# Altium PCB USB.PcbDoc
Units mil, origin at the board's own origin, x right, y up, seen from the top; angles counter-clockwise.
Board outline 2345 x 1600 mil, 2 copper layers (Top Layer, Bottom Layer), stack 65.792 mil thick; 40 components, 27 nets, 133 pads, 28 vias.
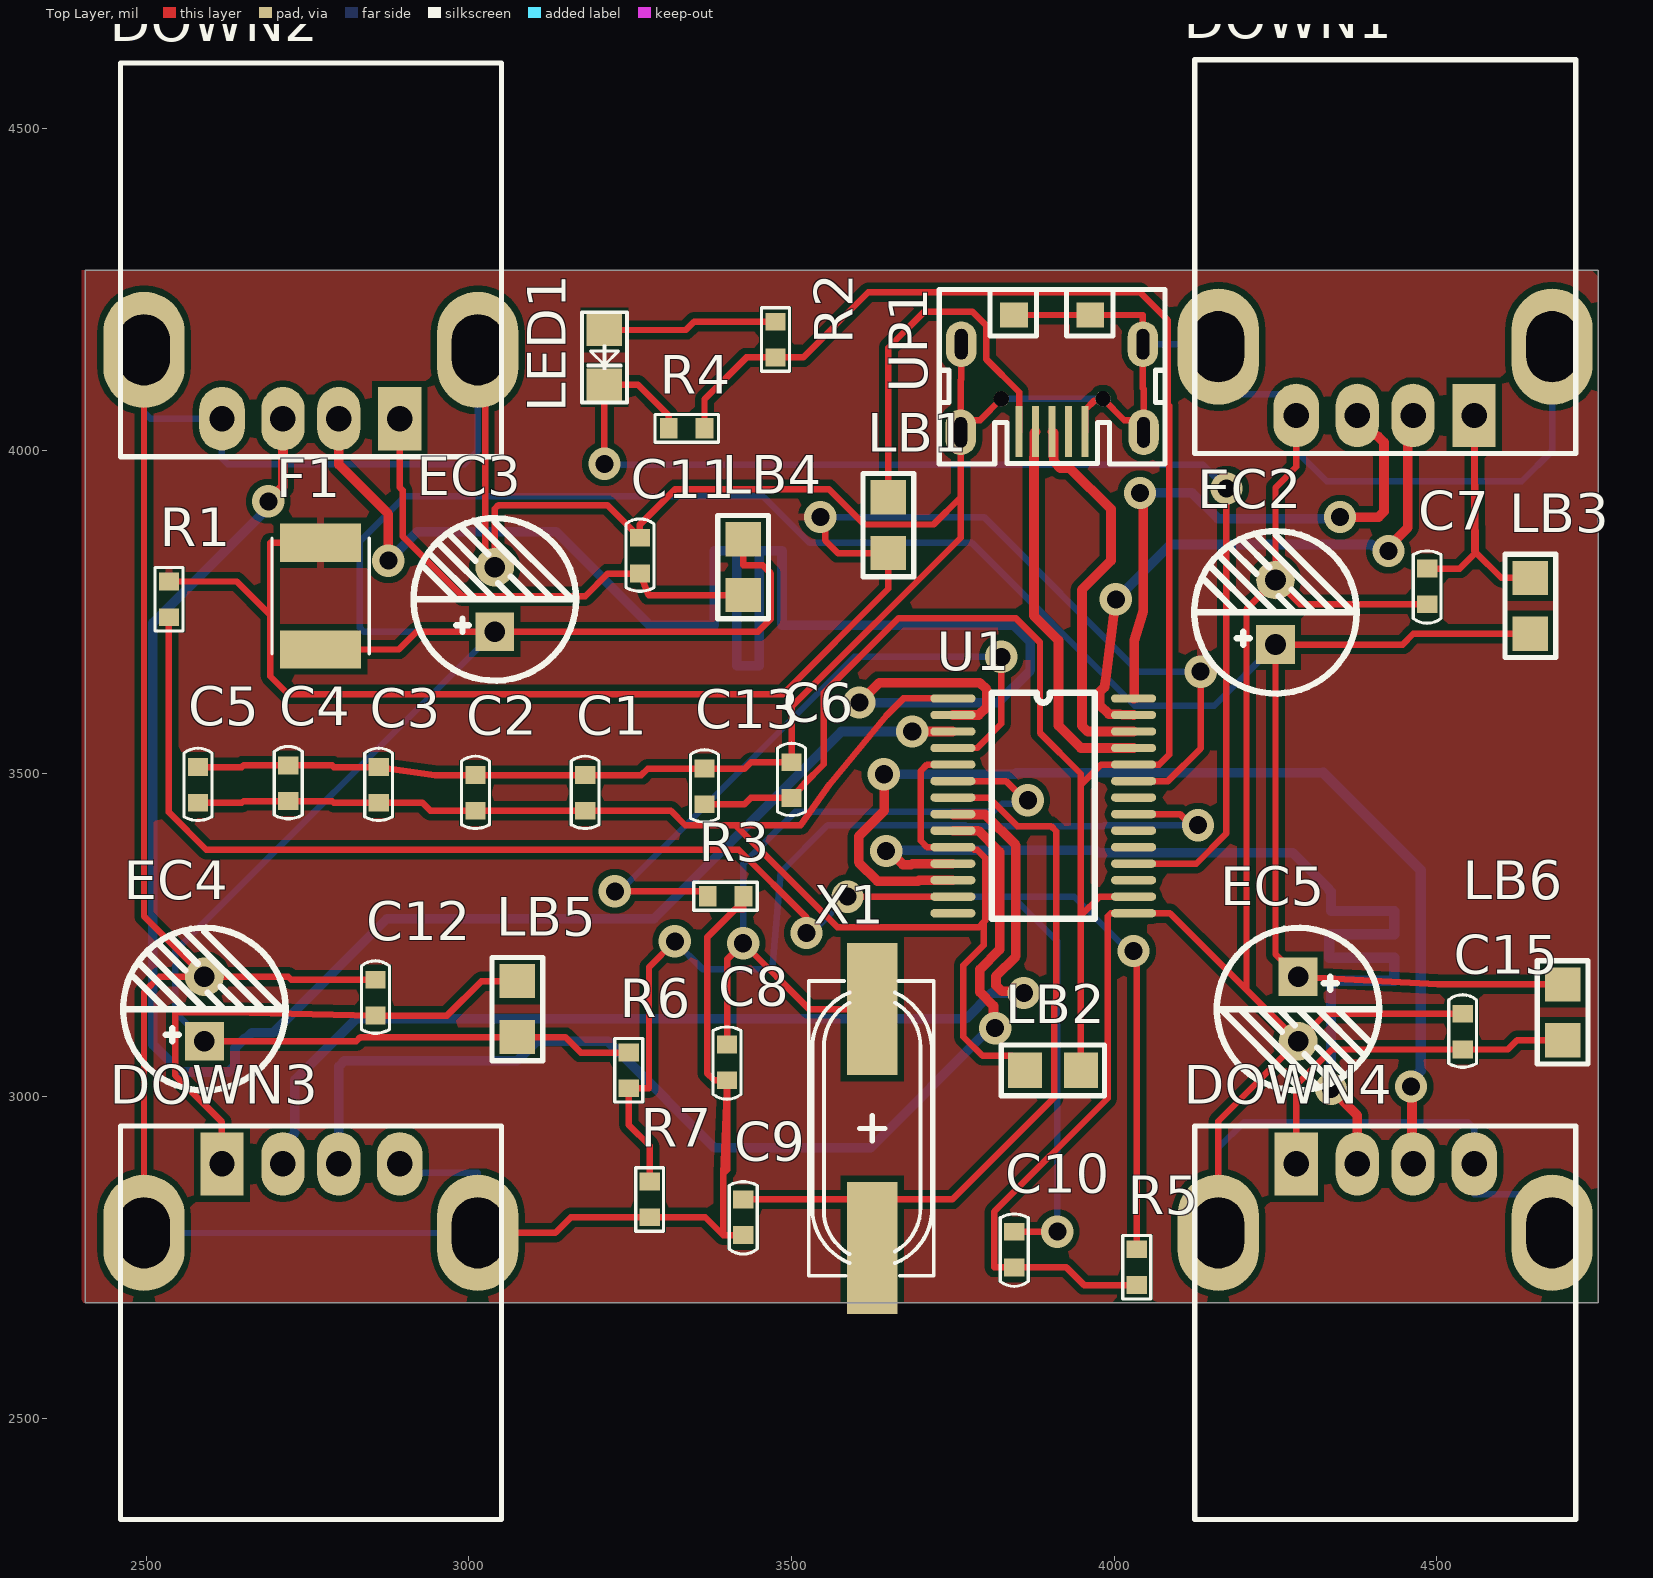
[diagram p0: Top Layer view]
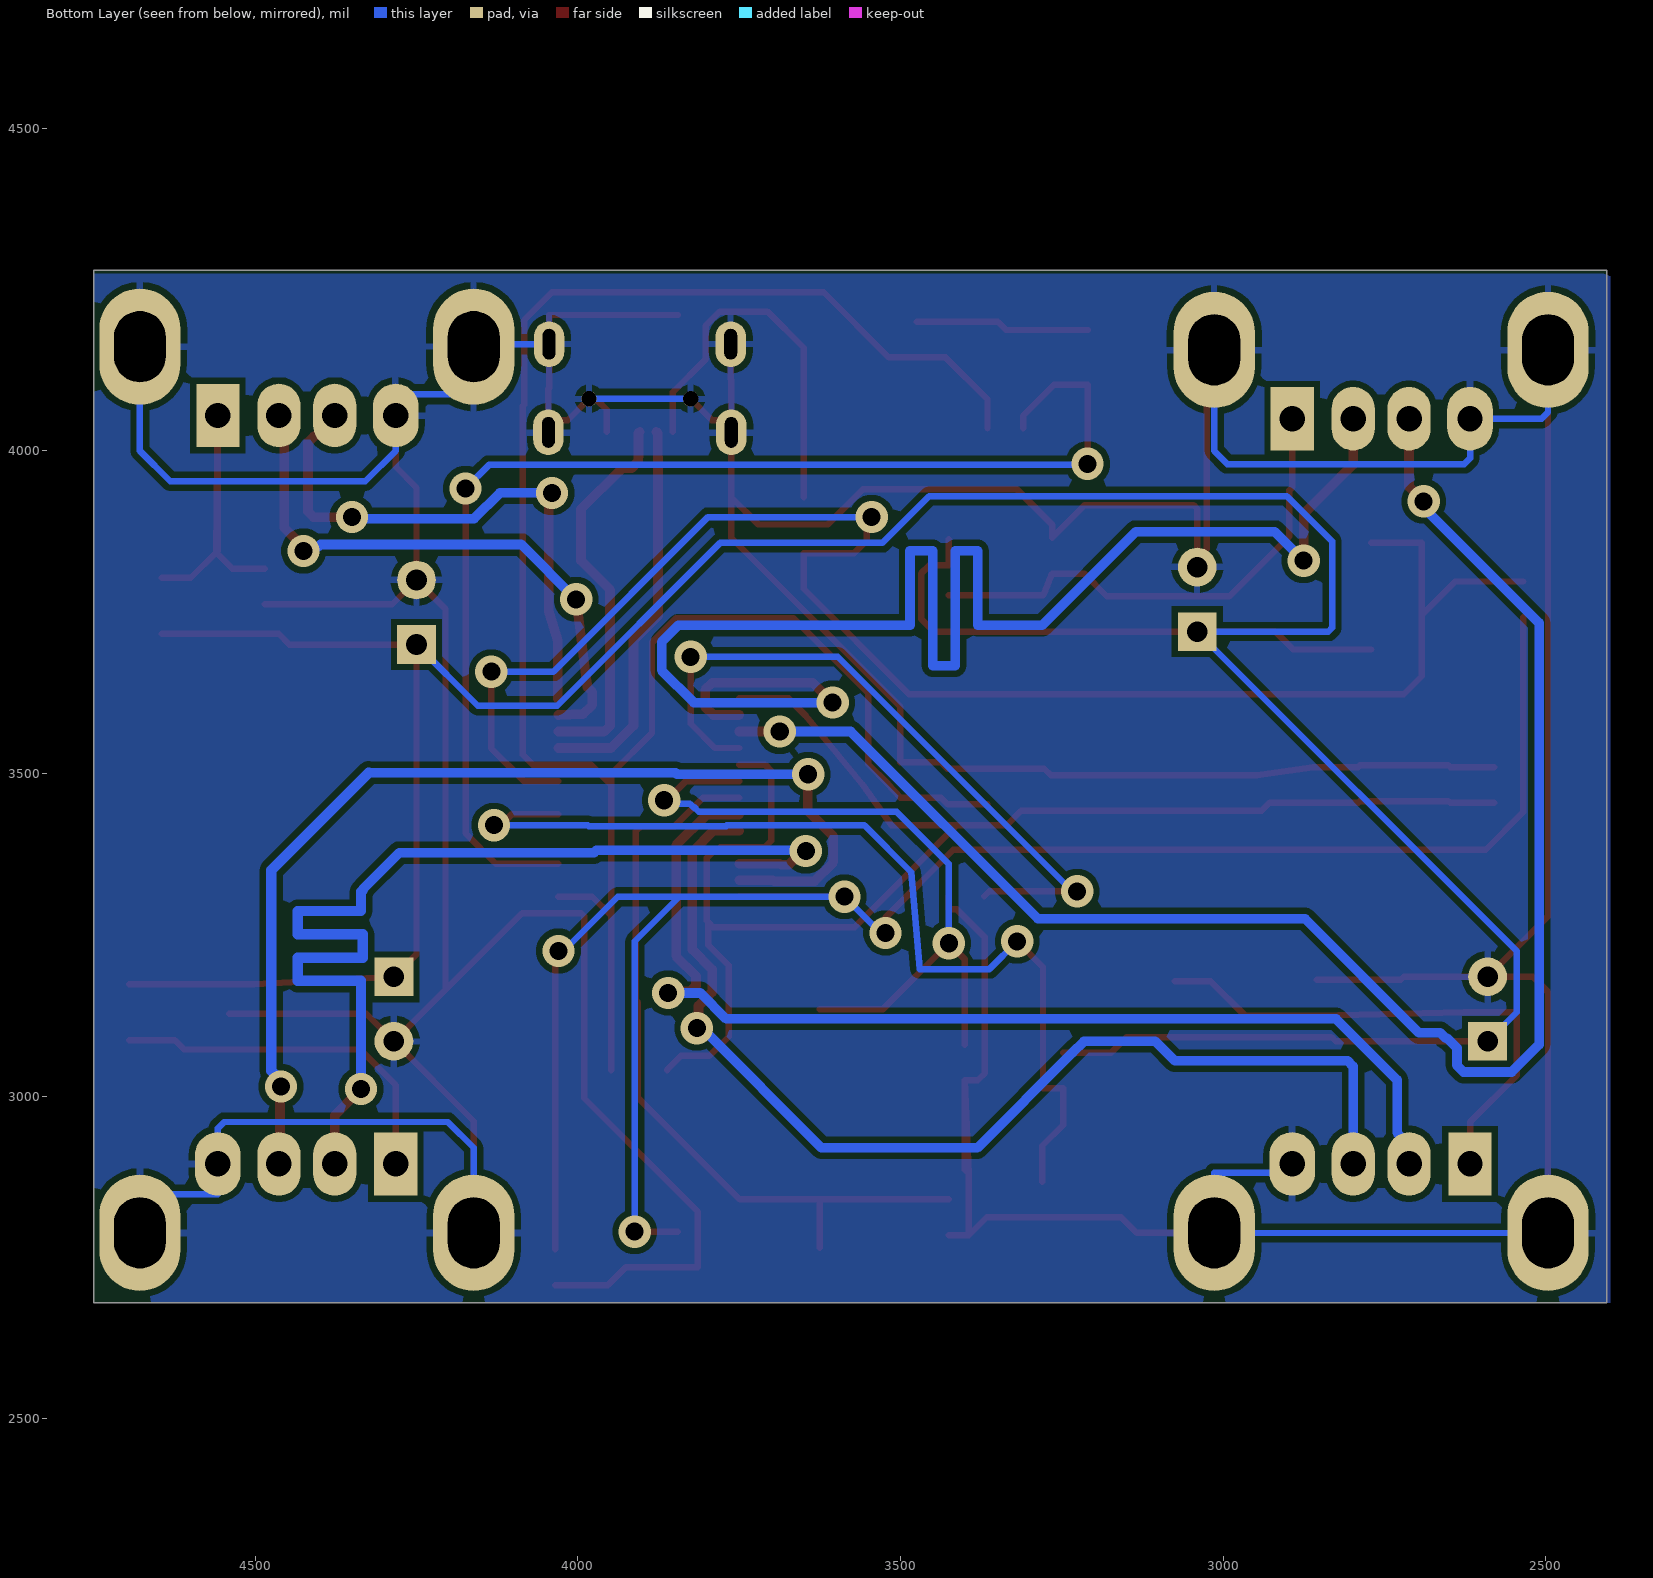
[diagram p1: Bottom Layer view, seen from below]

## Layer stack, top to bottom
Top Solder: solder mask 0.4, Solder Resist, Dk 3.5
Top Layer: signal copper 1.4
Dielectric 1: dielectric 62.9921, FR-4, Dk 4.8
Bottom Layer: signal copper 1.4
Bottom Solder: solder mask 0.4, Solder Resist, Dk 3.5

## Board outline
2405,4280 4750,4280 4750,2680 2405,2680

## Design rules (kind name [scope] priority, off if disabled: settings)
AssemblyTestPointUsage [All] p1: isadvanced=TRUE
AssemblyTestpoint [All] p1: isadvanced=TRUE testpointundercomponent=TRUE minsize=40 maxsize=100 preferedsize=60 minholesize=0 maxholesize=40 preferedholesize=32 testpointgrid=1 usegrid=TRUE gridtolerance=0.01 allowsidetop=TRUE allowsidebottom=TRUE
Clearance Clearance_1 [OnMid vs OnMid] p1: gap=10 ignorepadtopadclearanceinfootprint=FALSE sourcerule=40 cellrowname=All cellrowtype=0 cellcolname=All cellcoltype=0 innerlayers=TRUE
Clearance Clearance_2 [(ExistsOnLayer('Top Layer') Or ExistsOnLayer('Bottom Layer')) vs (ExistsOnLayer('Top Layer') Or ExistsOnLayer('Bottom Layer'))] p2: gap=10 ignorepadtopadclearanceinfootprint=FALSE sourcerule=40 cellrowname=All cellrowtype=0 cellcolname=All cellcoltype=0 outerlayers=TRUE
Clearance [All] p3: gap=10 ignorepadtopadclearanceinfootprint=FALSE ismatrix=TRUE
ComponentClearance [All] p1: isadvanced=TRUE gap=10 collisioncheckmode=3 verticalgap=10 showdistances=FALSE
DiffPairsRouting [All] p1: maxlimit=10 minlimit=10 mostfreqgap=10 toplayer_minwidth=15 toplayer_maxwidth=15 toplayer_prefwidth=15 bottomlayer_minwidth=15 bottomlayer_maxwidth=15 bottomlayer_prefwidth=15 maxuncoupledlength=500
FabricationTestPointUsage [All] p1: isadvanced=TRUE valid=0 allowmultiple=FALSE
FabricationTestpoint [All] p1: isadvanced=TRUE side=3 testpointundercomponent=TRUE minsize=40 maxsize=100 preferedsize=60 minholesize=0 maxholesize=40 preferedholesize=32 testpointgrid=1 allowsidetop=TRUE allowsidebottom=TRUE usegrid=TRUE gridtolerance=0.01
FanoutControl Fanout_BGA [IsBGA] p1: isadvanced=TRUE bgadir=Out bgaviamode=Centered fanoutstyle=Auto fanoutdirection=Alternating viagrid=1 // Fanout_BGA (Default Rule)
FanoutControl Fanout_LCC [IsLCC] p2: isadvanced=TRUE bgadir=Out bgaviamode=Centered fanoutstyle=Auto fanoutdirection=Alternating viagrid=1 // Fanout_LCC (Default Rule)
FanoutControl Fanout_SOIC [IsSOIC] p3: isadvanced=TRUE bgadir=Out bgaviamode=Centered fanoutstyle=Auto fanoutdirection=Alternating viagrid=1 // Fanout_SOIC (Default Rule)
FanoutControl Fanout_Small [(CompPinCount < 5)] p4: isadvanced=TRUE bgadir=Out bgaviamode=Centered fanoutstyle=Auto fanoutdirection=OutThenIn viagrid=1 // Fanout_Small (Default Rule)
FanoutControl Fanout_Default [All] p5: isadvanced=TRUE bgadir=Out bgaviamode=Centered fanoutstyle=Auto fanoutdirection=Alternating viagrid=1 // Fanout_Default (Default Rule)
Height [All] p1: isadvanced=TRUE minheight=0 maxheight=1000 prefheight=500
HoleSize [All] p1: isadvanced=TRUE absolutevalues=TRUE maxlimit=150 minlimit=1 maxpercent=80.000 minpercent=20.000
HoleToHoleClearance [All] p1: isadvanced=TRUE gap=10 allowstackedmicrovias=TRUE
LayerPairs [All] p1: isadvanced=TRUE enforce=TRUE
MinimumSolderMaskSliver [All] p1: isadvanced=TRUE minsoldermaskwidth=0
NetAntennae [All] p1: isadvanced=TRUE netantennaetolerance=0
PasteMaskExpansion [All] p1: isadvanced=TRUE expansion=0
PlaneClearance [All] p1: isadvanced=TRUE clearance=20
PlaneConnect [All] p1: isadvanced=TRUE planeconnectstyle=Relief reliefexpansion=20 reliefentries=4 reliefconductorwidth=10 reliefairgap=10
PolygonConnect [All] p1: connectstyle=Relief reliefconductorwidth=10 reliefentries=4 polygonreliefangle="90 Angle" airgapwidth=10
RoutingCorners [All] p1: isadvanced=TRUE cornerstyle=45-Degree minsetback=100 maxsetback=100
RoutingPriority [All] p1: isadvanced=TRUE routingpriority=0
RoutingVias [All] p1: holewidth=28 width=50 viastyle="Through Hole" minholewidth=28 minwidth=50 maxholewidth=28 maxwidth=50
ShortCircuit [All] p1: isadvanced=TRUE allowed=FALSE
SilkToSilkClearance [All] p1: isadvanced=TRUE silktosilkclearance=0
SilkToSolderMaskClearance [IsPad] p1: isadvanced=TRUE minsilkscreentomaskgap=0 clearancetoexposedcopper=TRUE
SolderMaskExpansion [All] p1: isadvanced=TRUE expansion=0 istentingtop=FALSE
SupplyNets "Schematic Supply Nets_3" [InNet('AVDD')] p1: isadvanced=TRUE voltage=0.000
SupplyNets "Schematic Supply Nets_2" [InNet('DGND')] p2: isadvanced=TRUE voltage=0.000
SupplyNets "Schematic Supply Nets_1" [InNet('DVDD')] p3: isadvanced=TRUE voltage=0.000
SupplyNets "Schematic Supply Nets" [InNet('VCC')] p4: isadvanced=TRUE voltage=0.000
UnRoutedNet [All] p1: isadvanced=TRUE
UnpouredPolygon [All] p1: isadvanced=TRUE
Width [All] p1: maxlimit=10 minlimit=10 preferedwidth=10
3 further rules are at their usual default settings.

## Classes and differential pairs
differential pair D_USB4: +USB4_P -USB4_N
differential pair D_USB3: +USB3_P -USB3_N
differential pair D_USB2: +USB2_P -USB2_N
differential pair D_USB1: +USB1_P -USB1_N
differential pair D_USB0: +USB0_P -USB0_N

## Components (designator, comment, footprint, x,y, rotation, side; value= is the part's Value field where it differs from the comment)
C1 "1uF" C0603 3180,3470 r270 top
C2 "0.1uF" C0603 3010,3470 r270 top
C3 "0.1uF" C0603 2860,3482.33 r270 top
C4 "0.1uF" C0603 2720,3485 r270 top
C5 "0.1uF" C0603 2580,3482.33 r270 top
C6 "0.1uF" C0603 3500,3490 r270 top
C7 "0.1uF" C0603 4485,3790 r90 top
C8 "20P" C0603 3400,3052.33 r90 top
C9 "20P" C0603 3425,2812.33 r90 top
C10 "0.1uF" C0603 3845,2762.33 r90 top
C11 "0.1uF" C0603 3265,3837.67 r270 top
C12 "0.1uF" C0603 2855,3152.67 r270 top
C13 "10uF" C0603 3365,3480 r270 top
C15 "0.1uF" C0603 4540,3100 r270 top
DOWN1 "USBA-A" USBA-A 4420,4055 r0 top
DOWN2 "USBA-A" USBA-A 2755,4050 r0 top
DOWN3 "USBA-A" USBA-A 2755,2895 r180 top
DOWN4 "USBA-A" USBA-A 4420,2895 r180 top
EC2 "100uF" CED-6_3-2_5 4250,3750 r90 top
EC3 "100uF" CED-6_3-2_5 3040,3770 r90 top
EC4 "100uF" CED-6_3-2_5 2590,3135 r90 top
EC5 "100uF" CED-6_3-2_5 4285,3135 r270 top
F1 "MF-MSMF125-2" FUSER_MF-MSMF125-2 2770,3775 r90 top
LB1 "FB" L0805 3650,3885 r90 top
LB2 "FB" L0805 3905,3040 r0 top
LB3 "FB" L0805 4645,3760 r90 top
LB4 "FB" L0805 3425,3820 r90 top
LB5 "FB" L0805 3075,3135 r270 top
LB6 "FB" L0805 4695,3130 r90 top
LED1 "PWR_LED" LED0805 3210,4145 r270 top
R1 "10K" R0603 2535,3770 r90 top
R2 "470R" R0603 3475,4172.67 r270 top
R3 "680R 1%" R0603 3397.67,3310 r180 top
R4 "100K" R0603 3337.33,4035 r0 top
R5 "47K" R0603 4035,2735 r90 top
R6 "10K" R0603 3247.67,3040 r90 top
R7 "20K" R0603 3280,2840 r90 top
U1 "GL850AUSB" SSOP28 3890,3450 r0 top
UP1 "SMD USB Micro" Micro_USB_MK5P 3903.82,4045.75 r0 top
X1 "12MHz" XTAL-49SMA-H4.2 3625,2950 r270 top

## Footprints (in the part's own frame and the unit in brackets; to place one, negate y for a bottom-side part, rotate by r counter-clockwise, add the part's x,y. Pads: shape width x height; smd on the part's side, far side on the other; paste and mask are expansions set on the pad)
C0603 [mm]
  rect 0.7x0.8 smd: 1(-0.703,0) 2(0.703,0)
  silkscreen extent -1.45,-0.55 1.4,0.55
CED-6_3-2_5 [mil]
  rect 60x60 hole 32: 1(-50,0)
  round 60 hole 32: 2(50,0)
  silkscreen extent -126,-126 126,126
FUSER_MF-MSMF125-2 [mm]
  rect 1.5x3.2 smd: 1(-2.1,0) 2(2.1,0)
  silkscreen extent -2.27,-1.91 2.27,1.91, body extent -2.27,-1.62 2.27,1.62, height 0.85
L0805 [mil]
  rect 53x55 smd: 1(-43.31,0) 2(43.31,0)
  silkscreen extent -80,-39 80,39
LED0805 [mil]
  rect 50x55 smd: 1(-42.5,0) 2(42.5,0)
  silkscreen extent -70,-35 70,35
Micro_USB_MK5P [mm]
  oval 1.2x1.8 hole 0.5 slot 1.2 at 90 deg: 0(-3.6,-0.43) 0(-3.575,3.04) 0(3.575,3.04) 0(3.6,-0.43)
  round 0.6 hole 0.6: 0(-2,0.89) 0(2,0.89)
  rect 1.1x1 smd: 0(-1.5,4.19) 0(1.5,4.19)
  rect 0.279x2 smd: 1(-1.3,-0.4) 2(-0.65,-0.4) 3(0,-0.4) 4(0.65,-0.4) 5(1.3,-0.4)
  silkscreen extent -4.45,-1.67 4.44,5.19
R0603 [mm]
  rect 0.7x0.8 smd: 1(-0.703,0) 2(0.703,0)
  silkscreen extent -1.25,-0.55 1.25,0.55
SSOP28 [mil]
  oval 70x13 smd: 1(-140,166.4) 2(-140,140.8) 3(-140,115.2) 4(-140,89.6) 5(-140,64) 6(-140,38.4) 7(-140,12.8) 8(-140,-12.8) 9(-140,-38.4) 10(-140,-64) 11(-140,-89.6) 12(-140,-115.2) 13(-140,-140.8) 14(-140,-166.4) 15(140,-166.4) 16(140,-140.8) 17(140,-115.2) 18(140,-89.6) 19(140,-64) 20(140,-38.4) 21(140,-12.8) 22(140,12.8) 23(140,38.4) 24(140,64) 25(140,89.6) 26(140,115.2) 27(140,140.8) 28(140,166.4)
  silkscreen extent -80,-175 80,175
USBA-A [mil]
  rect 67x98 hole 39.37: 1(137.8,0)
  oval 66.93x98.43 hole 39.37: 2(43.31,0) 3(-43.31,0)
  oval 70.87x98.43 hole 39.37: 4(-137.8,0)
  oval 125.98x180 hole 80 slot 110 at 90 deg: G1(-258.66,106.69) G2(258.66,106.69)
  silkscreen extent -295,-59 295,551
XTAL-49SMA-H4.2 [mm]
  rect 5.2x2 smd: 1(-4.7,0) 2(4.7,0)
  silkscreen extent -5.8,-2.5 5.8,2.42

## Part data
C1 C2 C3 C4 C5 C6 C7 C8 C9 C10 C11 C12 C13 C15: library part C-0603
EC2 EC3 EC4 EC5: library part CE-100UF/16V
F1: "Polymeric PTC Resettable Fuse 6V 1.25 A Ih Surface Mount 1812 (4532 Metric), Concave", Package="1812 Bourns", Availability="In Stock", Check_prices=https://www.snapeda.com/parts/MF-MSMF125-2/Bourns/view-part/?ref=eda, MF=Bourns, MP=MF-MSMF125-2, Price=None, Purchase-URL=https://pricing.snapeda.com/search/part/MF-MSMF125-2/?ref=eda, SnapEDA_Link=https://www.snapeda.com/parts/MF-MSMF125-2/Bourns/view-part/?ref=snap
LB1 LB2 LB3 LB4 LB5 LB6: library part FB-0805
LED1: library part LED-3mm_0
R1 R2 R4 R5 R6 R7: library part R-0603
  R1 R6: Parameter 1=10K
  R2: Parameter 1=470R
  R4: Parameter 1=100K
  R5: Parameter 1=47K
  R7: Parameter 1=20K
R3: library part "R-0603 1%", Parameter 1=680R
U1: library part GLI8024-48_3
UP1: library part CNS-USBminiAB-A
X1: library part XD-49US-A

## Via types
v1: diameter 50, hole 28, Top Layer to Bottom Layer, 28 vias

## Nets (pads, with @x,y where several pads share a name; then routed paths per layer and width w, separated by ;. In a path a pad name is that pad's centre, name@x,y a point inside that pad or via, vN(x,y) a via of type N, cw(c..) or ccw(c..) an arc to the next point about the centre after c; other vN are vias at no path point)
AVDD: C1.2 C2.2 C3.2 C4.2 C5.2 LB2.1 U1.1 U1.5 U1.10 | length 2415.5
  Top Layer w10: C5.2 2648,3454.66 2650.67,3457.33 C4.2 2788,3457.33 2790.67,3454.66 C3.2 2928,3454.66 2940.33,3442.33 C2.2 C1.2 3313,3442.33 3335.33,3420 3413,3420 ; U1.5 3710,3514 3700,3504 3700,3396 3710,3386 U1.10 3779.31,3386 3783.41,3381.9 3787.41,3381.9 3800,3369.31 3800,3272 3797.5,3269.5 ; U1.1 3673.4,3616.4 3647,3590 3559.24,3483.76 3514,3420 3413,3420 ; LB2.1 3861.69,3041 3840.19,3062.5 3795.93,3062.5 3766.25,3092.18 3766.25,3202.69 3797.5,3233.94 3797.5,3269.5 ; 3413,3420 3571,3262 3790,3262 3797.5,3269.5
DGND: C1.1 C2.1 C3.1 C4.1 C5.1 C6.1 C7.1 C8.1 C9.1 C10.1 C11.1 C12.1 C13.1 C15.1 DOWN1.4 DOWN1.G1 DOWN1.G2 DOWN2.4 DOWN2.G1 DOWN2.G2 DOWN3.4 DOWN3.G1 DOWN3.G2 DOWN4.4 DOWN4.G1 DOWN4.G2 EC2.2 EC3.2 EC4.2 EC5.2 R3.1 R5.1 R7.1 U1.15 UP1.0 UP1.5 | length 13397.1
  Top Layer w10: DOWN3.G2 2496.34,3161.34 2520,3185 EC4.2 ; DOWN2.G1 2496.34,3278.66 EC4.2 ; C5.1 2648,3510 2650.67,3512.67 C4.1 2788,3512.67 2790.67,3510 C3.1 2947.33,3497.67 C2.1 C1.1 3267,3497.67 3277,3507.67 C13.1 3427,3507.67 3437,3517.67 C6.1 3500,3603.4 3762.09,3865.49 3762.09,3928.09 ; C12.1 2724.66,3180.34 2720,3185 EC4.2 ; DOWN3.G1 3134,2788.31 3158.02,2812.33 R7.1 3366.33,2812.33 3394,2784.66 ; DOWN2.G2 3025,4145.35 3025,3848.53 EC3.2@3040,3833.53 ; C9.1 3394,2784.66 ; R3.1 3425.34,3290 3413,3290 3369,3246 3369,3035.66 3380,3024.66 C8.1 ; UP1.0@3763.07,4165.43 3763.07,4110.73 3762.09,4109.75 UP1.0@3762.09,4030.55 ; UP1.0@3825.08,4080.79 3792.05,4047.76 3779.29,4047.76 UP1.0@3762.09,4030.55 ; UP1.0@3844.76,4210.71 3962.87,4210.71 4044.57,4210.71 4044.57,4165.43 4044.57,4096.99 4045.55,4096 UP1.0@4045.55,4030.55 ; UP1.5 3955,4063.87 3969.31,4078.18 3979.95,4078.18 3982.56,4080.79 4015.59,4047.76 4028.35,4047.76 UP1.0@4045.55,4030.55 ; R5.1 3953.33,2707.33 3926,2734.66 C10.1 3814,2734.66 3814,2821.19 3989.81,2997 3989.81,3278.81 3994.6,3283.6 U1.15 4086.4,3283.6 4205,3165 ; UP1.0@4045.55,4028.82 UP1.0@4045.55,4030.55 ; DOWN4.G2 4161.34,2961.34 EC5.2 ; DOWN1.4 4282.2,3975.4 4250,3943.2 EC2.2 ; C7.1 4287.67,3762.33 EC2.2 ; C15.1 4327.67,3127.67 EC5.2 ; EC3.2@3040,3833.53 EC3.2 3040,3910.26 ; EC3.2@3040,3833.53 3040,3910.26 ; EC3.2@3040,3833.53 3040,3910.26 ; EC3.2@3040,3833.53 3040,3910.26 ; EC3.2@3040,3833.53 3040,3910.26 ; 3040,3910.26 3045.86,3916.12 3214.22,3916.12 C11.1 3265,3886 3320,3941 3557.69,3941 3612.69,3886 3720,3886 3762.09,3928.09 ; 3394,2784.66 3394,2880 ; 3394,2880 C8.1 ; 3394,2880 3400,2886 C8.1 ; 3762.09,3928.09 3762.09,4028.82 UP1.0@3762.09,4030.55 ; 4205,3165 4205,3755 EC2.2 ; 4205,3165 EC5.2
  Bottom Layer w10: DOWN3.G2 2496.34,2788 3013.66,2788 DOWN3.G1 3013.66,2881 2892.8,2881 DOWN3.4 ; DOWN2.G1 2496.34,4060 2506.34,4050 DOWN2.4 2617.2,3988.8 2626.34,3979.66 2993.32,3979.66 3013.66,4000 DOWN2.G2 ; UP1.0@3825.08,4080.79 UP1.0@3982.56,4080.79 ; UP1.0@4044.57,4165.43 4157.6,4165.43 DOWN1.G1 4161.34,4088 4282.2,4088 DOWN1.4 4282.2,4000 4329.2,3953 4631.66,3953 4678.66,4000 DOWN1.G2 ; DOWN4.G2 4161.34,2920 4201.34,2960 4547.8,2960 4557.8,2950 DOWN4.4 4557.8,2848 4678.66,2848 DOWN4.G1
DVDD: C6.2 C13.2 LB2.2 R2.2 R4.2 U1.16 U1.24 | length 3184.3
  Top Layer w10: C13.2 3427,3452.33 3437,3462.33 C6.2 3519.24,3483.76 3550,3514.52 3550,3625 3666,3741 3847.18,3741 3885,3703.18 3885,3563.02 3948.31,3499.71 3948.31,3482.31 ; R4.2 3365,4080 3430,4145 R2.2 3518,4145 3619,4246 4040,4246 4083.19,4202.81 4083.19,4071.81 4085,4070 4085,3529 4070,3514 U1.24 3980,3514 3948.31,3482.31 ; LB2.2 3948.31,3280 ; U1.16 3977.51,3309.2 3948.31,3280 ; 3948.31,3280 3948.31,3482.31
NetC7_2: C7.2 DOWN1.1 LB3.2 | length 612.4
  Top Layer w10: C7.2 4535.47,3817.67 4560.56,3842.76 ; LB3.2 4600,3803.31 4560.56,3842.76 ; 4560.56,3842.76 4557.8,3845.51 DOWN1.1 4560.56,3842.76
NetC11_2: C11.2 DOWN2.1 LB4.1 | length 787.3
  Top Layer w10: DOWN2.1 2892.8,3943.5 2897.5,3938.8 2897.5,3867.5 2990,3775 3180,3775 3215,3810 C11.2 3278.31,3776.69 LB4.1
NetC12_2: C12.2 DOWN3.1 LB5.1 | length 817
  Top Layer w10: DOWN3.1 2617.2,2960 2545,3032.2 2545,3130 2627,3130 C12.2 2966,3125 3019.31,3178.31 LB5.1
NetC15_2: C15.2 DOWN4.1 LB6.1 | length 563.8
  Top Layer w10: DOWN4.1 4282.2,3017.2 4337.33,3072.33 C15.2 4610,3072.33 4624.36,3086.69 LB6.1
NetLB1_2: LB1.2 UP1.1 | length 601
  Top Layer w10: LB1.2 3650,4160 3706,4216 3780,4216 3802,4194 3802,4141.78 3852.64,4091.14 UP1.1
NetLED1_1: LED1.1 R2.1 | length 270.3
  Top Layer w10: LED1.1 3336,4187.5 3348.84,4200.34 R2.1
OVCUR1#: R6.1 R7.2 U1.21 | length 1538.6
  Top Layer w10: R7.2 3280,2923 3247.67,2955.33 R6.1 3279,3012.33 3279,3200 v1(3319,3240) ; U1.21 4101.98,3437.2 4119.18,3420 v1(4130,3420)
  Bottom Layer w10: v1(3319,3240) 3362,3197 3470,3197 3483,3347.28 3555.72,3420 3768.83,3420 3770.14,3418.68 3983.25,3418.68 3984.56,3420 v1(4130,3420)
PGANG: LED1.2 R4.1 U1.18 | length 1939.5
  Top Layer w10: v1(3210,3980) LED1.2 3262,4102.5 3309.66,4054.84 R4.1 ; U1.18 4126.97,3360.4 4174,3407.43 v1(4174,3942)
  Bottom Layer w10: v1(3210,3980) 3211.62,3978.38 4137.62,3978.38 v1(4174,3942)
RESET#: C10.2 R1.1 R5.2 U1.13 | length 3188
  Top Layer w10: R1.1 2535,3440 2593,3382 3418,3382 3523,3277 v1(3523,3253) ; v1(3586.8,3309.2) U1.13 ; C10.2 v1(3911.8,2790) ; R5.2 v1@4035,3212.16
  Bottom Layer w10: v1(3523,3253) 3530.6,3253 v1(3586.8,3309.2) 3842.6,3309.2 ; v1(3911.8,2790) 3911.8,3240 3842.6,3309.2 ; v1@4037.32,3209.85 3937.96,3309.2 3842.6,3309.2
  other v1: 4030,3225
RREF: R3.2 U1.4 | length 1091.2
  Top Layer w10: v1(3226,3317.5) 3362.5,3317.5 R3.2 ; U1.4 3787.6,3539.6 3825,3577 v1(3825,3681)
  Bottom Layer w10: v1(3226,3317.5) 3233.5,3317.5 3597,3681 v1(3825,3681)
USB0_N: U1.25 UP1.2 | length 603.3
  Top Layer w15: UP1.2 3876.23,4028 3876.23,3990.91 3875.64,3990.32 3875.64,3744.36 3913.57,3706.43 3913.57,3574.21 3948.18,3539.6 U1.25
USB0_P: U1.26 UP1.3 | length 605
  Top Layer w15: UP1.3 3905.82,4028 3905.82,3990.91 3906.41,3990.32 3906.41,3983.38 3916.66,3973.13 3931.87,3973.13 3995,3910 3995,3830 3950,3785 3950,3573.99 3958.79,3565.2 U1.26
USB1_N: DOWN1.2 U1.27 | length 913.8
  Top Layer w15: v1(4002.5,3770) 3986.71,3647.17 3985,3633.84 3977.5,3626.34 3977.5,3606.46 3991.56,3592.4 U1.27 ; v1(4425,3845) 4425,3851.29 4455,3881.29 4455,4046.69 DOWN1.2
  Bottom Layer w15: v1(4002.5,3770) 4087.5,3855 4398.71,3855 4402.02,3851.7 4418.3,3851.7 v1(4425,3845)
USB1_P: DOWN1.3 U1.28 | length 890.2
  Top Layer w15: U1.28 4031,3616.4 4031,3706.43 4043.26,3746.7 4045,3752.4 4045,3930 v1(4040,3935) ; v1(4350,3897.5) 4409.48,3897.5 4418.27,3906.29 4418.27,4013.42 4409.14,4022.55 4407.44,4022.55 4376.69,4053.3 DOWN1.3
  Bottom Layer w15: v1(4040,3935) 4120.9,3935 4160.9,3895 4347.5,3895 v1(4350,3897.5)
USB2_N: DOWN2.2 U1.2 | length 2552.3
  Top Layer w15: DOWN2.2 2798.31,3978.69 2875,3902 v1(2875,3830) ; v1(3605,3610) 3636,3641 3791.5,3641 3802.5,3630 3802.5,3603.3 3790,3590.8 U1.2
  Bottom Layer w15: v1(2875,3830) 2920,3875 3135,3875 3280,3730 3372.51,3730 3380.01,3730 3380.01,3845.24 3415.01,3845.24 3415.01,3666.98 3450.01,3666.98 3450.01,3845.24 3485.01,3845.24 3485.01,3730 3502.5,3730 3844.08,3730 3870,3704.08 3870,3660 3820,3610 v1(3605,3610)
USB2_P: DOWN2.3 U1.3 | length 2545.4
  Top Layer w15: v1(2689,3922) 2711.69,3944.69 DOWN2.3 ; v1(3687,3565.2) U1.3
  Bottom Layer w15: v1(2689,3922) 2689,3912.53 2510,3733.53 2510,3080.25 2552.75,3037.5 2627.25,3037.5 2637.5,3047.75 2637.5,3074.71 2652.79,3090 2655,3090 2663.21,3098.21 2696.21,3098.21 2873,3275 3287,3275 3577.2,3565.2 v1(3687,3565.2)
USB3_N: DOWN3.2 U1.8 | length 1719.3
  Top Layer w15: U1.8 3750.6,3436.6 3799.88,3436.6 3847.5,3388.98 3847.5,3216.77 3816.71,3185.98 3816.71,3171.46 3825.49,3162.67 3857.33,3162.67 v1(3860,3160)
  Bottom Layer w15: DOWN3.2 2711.69,2924.8 2730,2943.11 2730,3025 2825,3120 3770,3120 3810,3160 v1(3860,3160)
USB3_P: DOWN3.3 U1.9 | length 1711.6
  Top Layer w15: U1.9 3789.53,3411.6 3822.5,3378.63 3822.5,3227.12 3791.71,3196.33 3791.71,3161.1 3812.87,3139.94 3812.87,3108.1 v1(3815.54,3105.43)
  Bottom Layer w15: DOWN3.3 2798.31,3046.21 2807.1,3055 3075,3055 3105,3085 3150,3085 3215.75,3085 3233.25,3067.5 3380.75,2920 3622.18,2920 3807.62,3105.43 v1(3815.54,3105.43)
USB4_N: DOWN4.2 U1.11 | length 1666.3
  Top Layer w15: v1(3646.51,3380) 3651.53,3380 3672.8,3358.73 3685.23,3358.73 3686.9,3360.4 U1.11 ; v1(4336,3011) 4376.69,2970.31 DOWN4.2
  Bottom Layer w15: v1(3646.51,3380) 3647.51,3381 3971.34,3381 3974.84,3377.5 4276.38,3377.5 4332.05,3321.82 4332.05,3321.05
  Bottom Layer w16.09: 4332.05,3321.05 4336,3317.11 4336,3295 4336,3286.96 4433.91,3286.96 4433.91,3250.87 4333.04,3250.87 4333.04,3214.78 4433.91,3214.78 4433.91,3178.7 4336,3178.7 4336,3165 v1(4336,3011)
USB4_P: DOWN4.3 U1.12 | length 1670.3
  Top Layer w15: v1(3643,3499) 3643.74,3498.26 3643.74,3442.48 3604.01,3402.75 3604.01,3362.4 3633.28,3333.13 3695.83,3333.13 3697.5,3334.8 U1.12 ; v1(4460,3015) 4461.66,3013.35 4461.66,2896.66 DOWN4.3
  Bottom Layer w15: v1(3643,3499) 3846.4,3499 3848.58,3501.18 4323.82,3501.18
  Bottom Layer w16.09: 4323.82,3501.18 4475,3350 4475,3039.18 4460,3024.18 v1(4460,3015)
VCC: F1.2 LB1.1 R1.2 U1.23 | length 2633.6
  Top Layer w10: R1.2 2640,3797.67 2692,3745.67 ; F1.2 2692,3857.68 2692,3745.67 ; v1(3544.62,3897.5) 3552.27,3889.85 3552.27,3861.35 3571.93,3841.69 LB1.1 3650,3786.29 3486.71,3623 2720,3623 2692,3651 2692,3745.67 ; U1.23 4083.4,3488.4 4134,3539 v1(4134,3658)
  Bottom Layer w10: v1(3544.62,3897.5) 3798.21,3897.5 4037.71,3658 v1(4134,3658)
VDP: EC2.1 EC3.1 EC4.1 EC5.1 F1.1 LB3.1 LB4.2 LB5.2 LB6.2 R6.2 | length 5714.8
  Top Layer w10: EC4.1 2825.31,3085 2832,3091.69 LB5.2 3149,3091.69 3173.02,3067.67 R6.2 ; F1.1 2891,3692.32 2918.68,3720 EC3.1 3448,3720 3468,3740 3468,3810 3455,3823 3425,3823 LB4.2 ; LB3.1 4463.69,3716.69 4447,3700 EC2.1 4250,3220 EC5.1 4501.69,3173.31 LB6.2
  Bottom Layer w10: EC4.1 2545,3130 2545,3225 EC3.1 2836.86,3720 2831,3725.86 2831,3860 2901,3930 3455.55,3930 3528.05,3857.5 3779.5,3857.5 4032,3605 4155,3605 EC2.1
X1: C8.2 U1.6 X1.1 | length 1143.1
  Top Layer w10: C8.2 3400,3212 v1(3425,3237) 3526.96,3135.04 X1.1 ; U1.6 3832.26,3488.4 3861.98,3458.68 v1(3866.18,3458.68)
  Bottom Layer w10: v1(3425,3237) 3425,3360 3506,3441 3812.66,3441 3819.76,3448.1 3821.18,3448.1 3826.18,3453.1 3860.6,3453.1 v1(3866.18,3458.68)
X2: C9.2 U1.7 X1.2 | length 1218
  Top Layer w10: C9.2 X1.2@3625,2840 ; X1.2 X1.2@3625,2840 ; U1.7 3805.5,3462.8 3849.62,3418.68 3901.96,3418.68 3910,3410.64 3910,3148.43 3906.81,3145.24 3906.81,2997.81 3749,2840 X1.2@3625,2840
pads on no net: U1.14 U1.17 U1.19 U1.20 U1.22 UP1.4

## Polygon pours and split planes (outlines as drawn)
DGND on Bottom Layer "DGND_L02_P000" (solid, pour order 0): 2405,4280 2410,4275 4750,4275 4750,2680 4745,2675 4740,2680 2400,2680 2400,4275
VCC on Top Layer "VCC_L01_P001" (solid, pour order 1): 4740,4280 4750,4270 4750,2680 2395,2680 2400,2685 2400,4280